# EAGLE board Kontrolky (EAGLE 6.3)
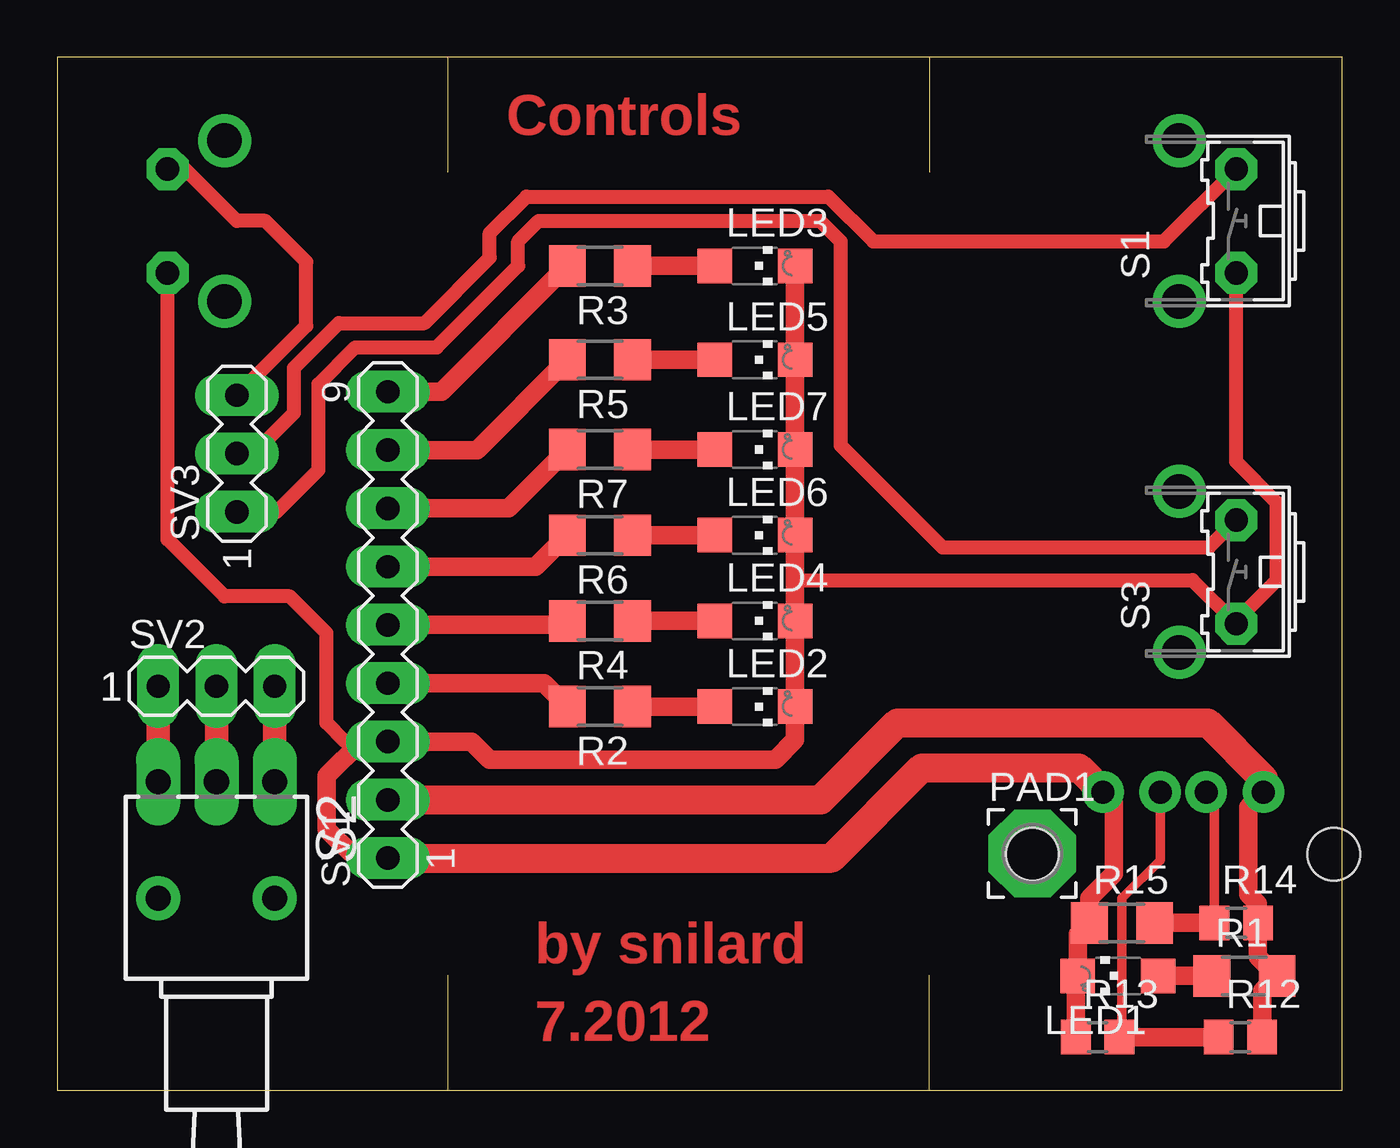
[diagram p0: board, top side]
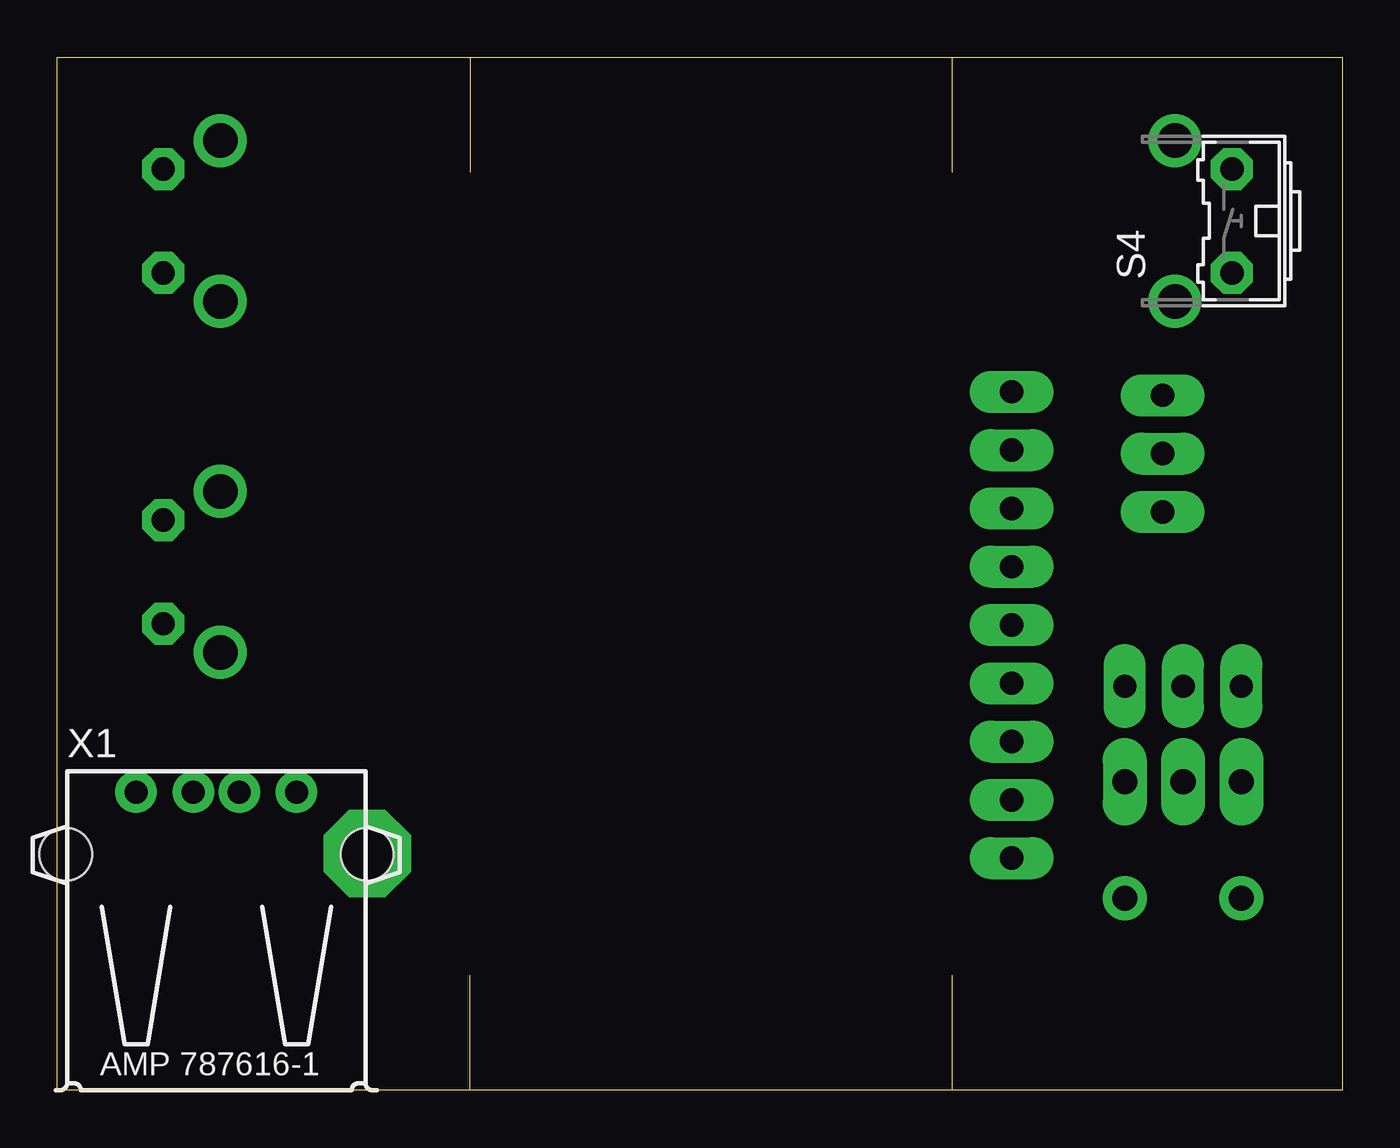
[diagram p1: board, bottom side, seen from below]

Size 56 x 45 mm. Coordinates in mm from the lower left corner, seen from the top.
Outline: 17,0 0,0 0,45 17,45
Outline: 17,0 38,0
Outline: 38,0 56,0 56,45 38,45
Outline: 38,45 17,45
Outline: 17,5 17,0
Outline: 38,0 38,5
Outline: 38,45 38,40
Outline: 17,45 17,40
Copper layers (1*16): Top 0.035mm / dielectric 1.5mm / Bottom 0.035mm
Design rules "default *": minimum track width 10mil, minimum drill 24mil, track to track 12mil, track to pad 12mil, pad to pad 12mil, via to via 12mil, smd to smd 12mil, copper to edge 40mil, drill to drill 8mil, minimum pad ring 16mil, minimum via ring 15mil, stop-mask expansion 4mil, vias tented up to drill 0mil, thermal gap 10mil
bRestrict: area 16.5,49.8 to 17.8,50.5

## Footprints (pad centres in the part's own frame; a part is rotated, then mirrored left to right if it is on the bottom)
CHIPLED_1206 = smd 1.5 x 1.5: A 0,-1.75; C 0,1.75
3,81/1,4 = drill 1.397 pad 3.81 octagon: 1 0,0
R1206 = smd 1.6 x 1.803: 1 -1.422,0; 2 1.422,0
R0805 = smd 1.3 x 1.5: 1 -0.95,0; 2 0.95,0
B3F-31XX = drill 1.016 octagon: 1 -2.261,-1.245; 2 2.261,-1.245 | drill 1.499 pad 2.159: 3 -3.505,1.245; 4 3.505,1.245
TL3XWO = drill 1.1 pad 1.422 long: 1 -2.54,-5.08; 2 0,-5.08; 3 2.54,-5.08 | drill 1.1 pad 1.676: M1 -2.54,0; M2 2.54,0
MA09-1 = drill 1.016 long: 1 -10.16,0; 2 -7.62,0; 3 -5.08,0; 4 -2.54,0; 5 0,0; 6 2.54,0; 7 5.08,0; 8 7.62,0; 9 10.16,0
MA03-1 = drill 1.016 long: 1 -2.54,0; 2 0,0; 3 2.54,0
USB = drill 1: 1 -3.5,12.99; 2 -1,12.99; 3 1,12.99; 4 3.5,12.99 | hole 2.3: -6.57,10.28; 6.57,10.28

## Placement (x,y rotation side)
LED1  [CHIPLED_1206]  46.23,4.98 90 top
LED2  [CHIPLED_1206]  30.4,16.71 270 top
LED3  [CHIPLED_1206]  30.4,35.92 270 top
LED4  [CHIPLED_1206]  30.4,20.45 270 top
LED5  [CHIPLED_1206]  30.4,31.83 270 top
LED6  [CHIPLED_1206]  30.4,24.18 270 top
LED7  [CHIPLED_1206]  30.4,27.91 270 top
PAD1  [3,81/1,4]  42.49,10.31 0 top
R1  33K  [R1206]  51.74,4.98 0 top
R2  33K  [R1206]  23.65,16.71 180 top
R3  33K  [R1206]  23.65,35.92 180 top
R4  33K  [R1206]  23.65,20.45 180 top
R5  33K  [R1206]  23.65,31.83 180 top
R6  33K  [R1206]  23.65,24.18 180 top
R7  33K  [R1206]  23.65,27.91 180 top
R12  33K  [R0805]  51.56,2.31 0 top
R13  23K  [R0805]  45.34,2.31 0 top
R14  33K  [R0805]  51.38,7.29 0 top
R15  47K  [R1206]  46.41,7.29 0 top
S1  DTS-6  [B3F-31XX]  50.14,37.87 90 top
S2  TL36WO  [TL3XWO]  6.93,8.36 180 top
S3  DTS-6  [B3F-31XX]  50.14,22.58 90 top
S4  DTS-6  [B3F-31XX]  6.05,37.87 90 bottom
SV1  [MA09-1]  14.4,20.27 90 top
SV2  [MA03-1]  6.93,17.6 0 top
SV3  [MA03-1]  7.82,27.74 90 top
X1  [USB]  49.07,0 0 bottom

## Library data of the parts
LED1-LED7 = led
PAD1 = wirepad
R1-R7 R12-R15 = rcl
S1 S3 S4 = switch-omron; MPN: B3F-3100; OC_FARNELL: 959704; OC_NEWARK: 36M3582
S2 = switch
SV1-SV3 = con-lstb; OC_FARNELL: unknown; OC_NEWARK: unknown
X1 = con-amp; MF: TYCO ELECTRONICS; MPN: 787616-1; OC_FARNELL: unknown; OC_NEWARK: 83F4514

## Nets
GND: LED1.C LED2.C LED3.C LED4.C LED5.C LED6.C LED7.C R13.1 R15.1 S1.1 S3.1 S4.1 SV1.1 SV1.3 X1.4
N$1: LED1.A R1.1
N$2: LED2.A R2.1
N$3: LED3.A R3.1
N$4: LED4.A R4.1
N$5: LED5.A R5.1
N$6: LED7.A R7.1
N$7: LED6.A R6.1
N$8: R2.2 SV1.4
N$9: R3.2 SV1.9
N$10: R4.2 SV1.5
N$11: R5.2 SV1.8
N$12: R6.2 SV1.6
N$13: R7.2 SV1.7
N$14: S2.2 SV2.2
N$15: S2.1 SV2.3
N$16: S2.3 SV2.1
N$17: S1.2 SV3.2
N$18: S4.2 SV3.3
N$19: S3.2 SV3.1
N$29: R12.1 R13.2 X1.3
N$30: R14.1 R15.2 X1.2
N$83: R1.2 R12.2 R14.2 SV1.2 X1.1

## Tracks (layer width: path | path; a pad name or v marks a point on that pad's centre or on a via)
GND
  Top 0.61: 32.15,22.23 49.48,22.23 S3.1 51.38,20.45 53.16,22.23 53.16,25.6 51.38,27.38 S1.1 | S4.1 4.8,24 7.29,21.51 10.13,21.51 11.73,19.91 11.73,16 12.55,15.19 SV1.3
  Top 0.813: X1.4 46.05,12.51 46.05,9.42 44.98,8.36 R15.1 44.48,6.78 LED1.C 44.39,4.89 R13.1 | LED3.C LED5.C LED7.C LED6.C 32.15,22.23 LED4.C LED2.C 32.15,15.26 31.29,14.4 18.85,14.4 18.06,15.19 SV1.3 13.23,15.19 11.73,13.69 11.73,11.38 12.8,10.31 14.2,10.31 SV1.1
  Top 1.27: X1.4 44.52,14.05 37.69,14.05 33.76,10.11 SV1.1
N$1
  Top 0.813: LED1.A R1.1
N$2
  Top 0.813: R2.1 LED2.A
N$3
  Top 0.813: R3.1 LED3.A
N$4
  Top 0.813: R4.1 LED4.A
N$5
  Top 0.813: R5.1 LED5.A
N$6
  Top 0.813: R7.1 LED7.A
N$7
  Top 0.813: R6.1 LED6.A
N$8
  Top 0.813: SV1.4 21.21,17.73 R2.2
N$9
  Top 0.813: SV1.9 16.74,30.43 R3.2
N$10
  Top 0.813: SV1.5 22.05,20.27 R4.2
N$11
  Top 0.813: SV1.8 18.29,27.89 R5.2
N$12
  Top 0.813: SV1.6 20.85,22.81 R6.2
N$13
  Top 0.813: SV1.7 19.66,25.35 R7.2
N$14
  Top 1.016: S2.2 SV2.2
N$15
  Top 1.016: S2.1 SV2.3
N$16
  Top 1.016: S2.3 SV2.1
N$17
  Top 0.61: SV3.2 8.53,27.74 10.31,29.52 10.31,31.47 12.27,33.43 16,33.43 18.85,36.27 18.85,37.34 20.45,38.94 33.6,38.94 35.56,36.98 48.23,36.98 S1.2
N$18
  Top 0.61: S4.2 5.56,40.13 7.82,37.87 9.07,37.87 10.85,36.09 10.85,33.3 SV3.3
N$19
  Top 0.61: SV3.1 9.55,25.2 11.38,27.03 11.38,30.76 12.98,32.36 16.54,32.36 20.09,35.92 20.09,36.98 20.98,37.87 33.25,37.87 34.14,36.98 34.14,28.09 38.58,23.65 50.19,23.65 S3.2
N$29
  Top 0.406: X1.3 48.07,10.02 46.41,8.36 46.41,2.43 R13.2
  Top 0.813: R13.2 R12.1
N$30
  Top 0.406: R14.1 50.43,12.63 X1.2
  Top 0.813: R15.2 R14.1
N$83
  Top 0.813: X1.1 51.92,12.34 51.92,8.53 52.33,8.12 R14.2 52.33,5.81 R1.2 52.51,4.33 R12.2
  Top 1.27: X1.1 52.57,13.57 50.14,16 36.63,16 33.27,12.65 SV1.2

## Text on the board
Top: Controls | by snilard | 7.2012